# Altium PCB koruza-hs-holder-PCB.PcbDoc
Units mm, origin at the board's own origin, x right, y up, seen from the top; angles counter-clockwise.
Board outline 30 x 15.7 mm, 2 copper layers (Top Layer, Bottom Layer); 3 components, 0 nets, 9 pads, 0 vias.
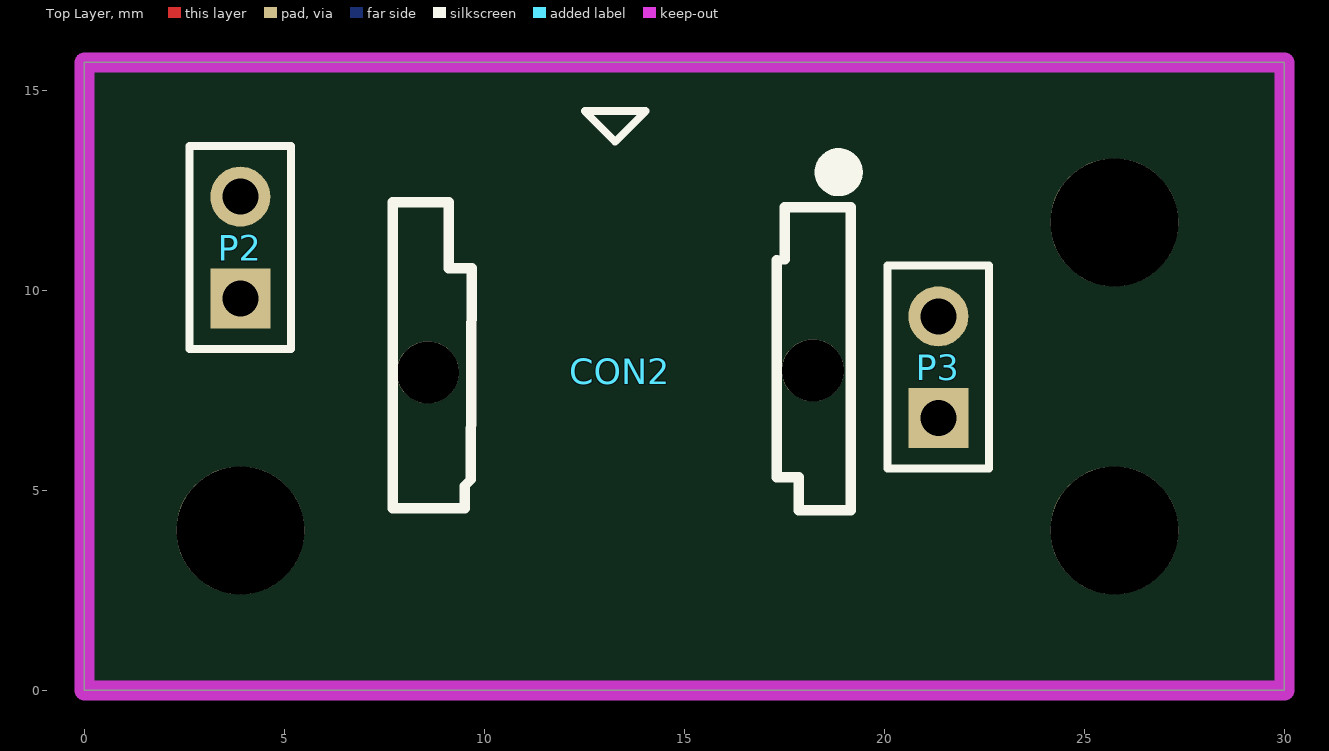
[diagram p0: Top Layer view]
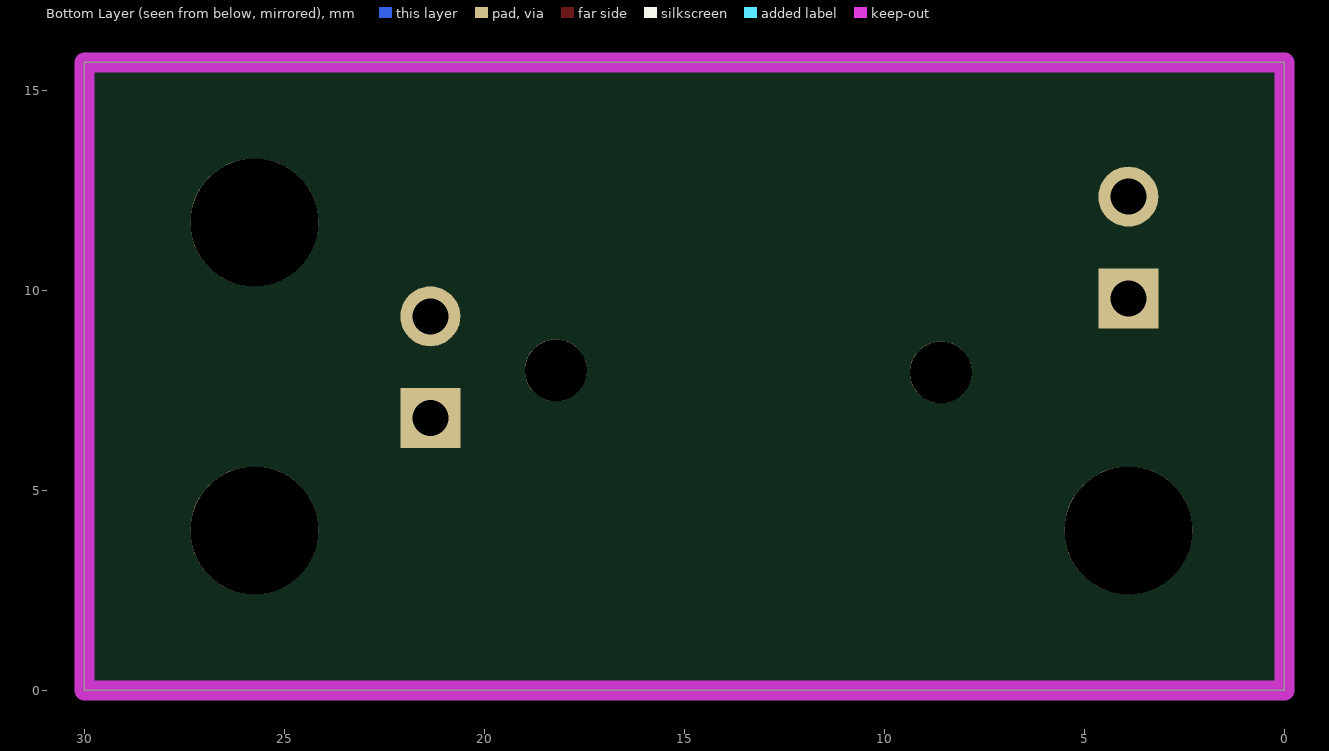
[diagram p1: Bottom Layer view, seen from below]

## Layer stack, top to bottom
Top Solder: solder mask 0.0102, Solder Resist, Dk 3.5
Top Layer: signal copper 0.0356
Dielectric 1: dielectric 0.32, FR-4, Dk 4.8
Bottom Layer: signal copper 0.0356
Bottom Solder: solder mask 0.0102, Solder Resist, Dk 3.5

## Board outline
0,0 0,15.7 30,15.7 30,0

## Design rules (kind name [scope] priority, off if disabled: settings)
Clearance [All] p1: gap=0.254
PolygonConnect [All] p1: connectstyle=Relief reliefconductorwidth=0.254 reliefentries=4 polygonreliefangle="90 Angle" airgapwidth=0.254
RoutingVias [All] p1: holewidth=0.711 width=1.27 viastyle="Through Hole" minholewidth=0.711 minwidth=1.27 maxholewidth=0.711 maxwidth=1.27
SolderMaskExpansion [All] p1: expansion=0.102
Width [All] p1: maxlimit=0.254 minlimit=0.254 preferedwidth=0.254
30 further rules are at their usual default settings.

## Components (designator, comment, footprint, x,y, rotation, side; value= is the part's Value field where it differs from the comment)
CON2 "SFP" SFP 13.4,8 r180 top locked
P2 "Header 2" HDR1X2 3.9,9.8 r90 top
P3 "Header 2" HDR1X2 21.35,6.81 r90 top

## Footprints (in the part's own frame and the unit in brackets; to place one, negate y for a bottom-side part, rotate by r counter-clockwise, add the part's x,y. Pads: shape width x height; smd on the part's side, far side on the other; paste and mask are expansions set on the pad)
HDR1X2 [mm]
  rect 1.5x1.5 hole 0.9: 1(0,0)
  round 1.5 hole 0.9: 2(2.54,0)
  silkscreen extent -1.27,-1.27 3.81,1.27
SFP [mm] "SFP connector without cage"
  round 1.55 hole 1.55: 35(4.813,0.05) 36(-4.812,0)
  silkscreen extent -5.76,-6.48 5.69,3.5

## Part data
CON2: library part "SFP connector reverse", "SFP, woutout cage, reverse orientation of SFP module"
P2 P3: "Header, 2-Pin"

## Free pads (board coordinates)
  round 3.2 hole 3.2 unplated: 1(3.9,4) 1(25.75,4) 1(25.75,11.7)

## Nets (pads, with @x,y where several pads share a name; then routed paths per layer and width w, separated by ;. In a path a pad name is that pad's centre, name@x,y a point inside that pad or via, vN(x,y) a via of type N, cw(c..) or ccw(c..) an arc to the next point about the centre after c; other vN are vias at no path point)
pads on no net: CON2.35 CON2.36 P2.1 P2.2 P3.1 P3.2

## Keep-outs
Keep-Out Layer:
  lines w0.5: 0,15.7 0,15.7 ; 0,15.7 0,0 30,0 30,15.7 0,15.7

## Silkscreen, mask and mechanical layers (free items; w line width, h text height)
Mechanical 1:
  circle w0.178: c3.9,4 r3
  circle w0.178: c25.75,4 r3
  circle w0.178: c25.75,11.7 r3

## Dimensions
19.162,4.5 to 25.75,4 on Mechanical 1
30,0 to 25.75,4 on Mechanical 1
3.9,4 to 0,0 on Mechanical 1
3.9,4 to 30,0 on Mechanical 1
25.75,11.7 to 30,15.7 on Mechanical 1
0,15.7 to 30,15.7 on Mechanical 1
0,15.7 to 0,0 on Mechanical 1